# EAGLE board A111_Pulsed_Radar_Breakout-Panel (EAGLE 9.0.1), part 1 of 3
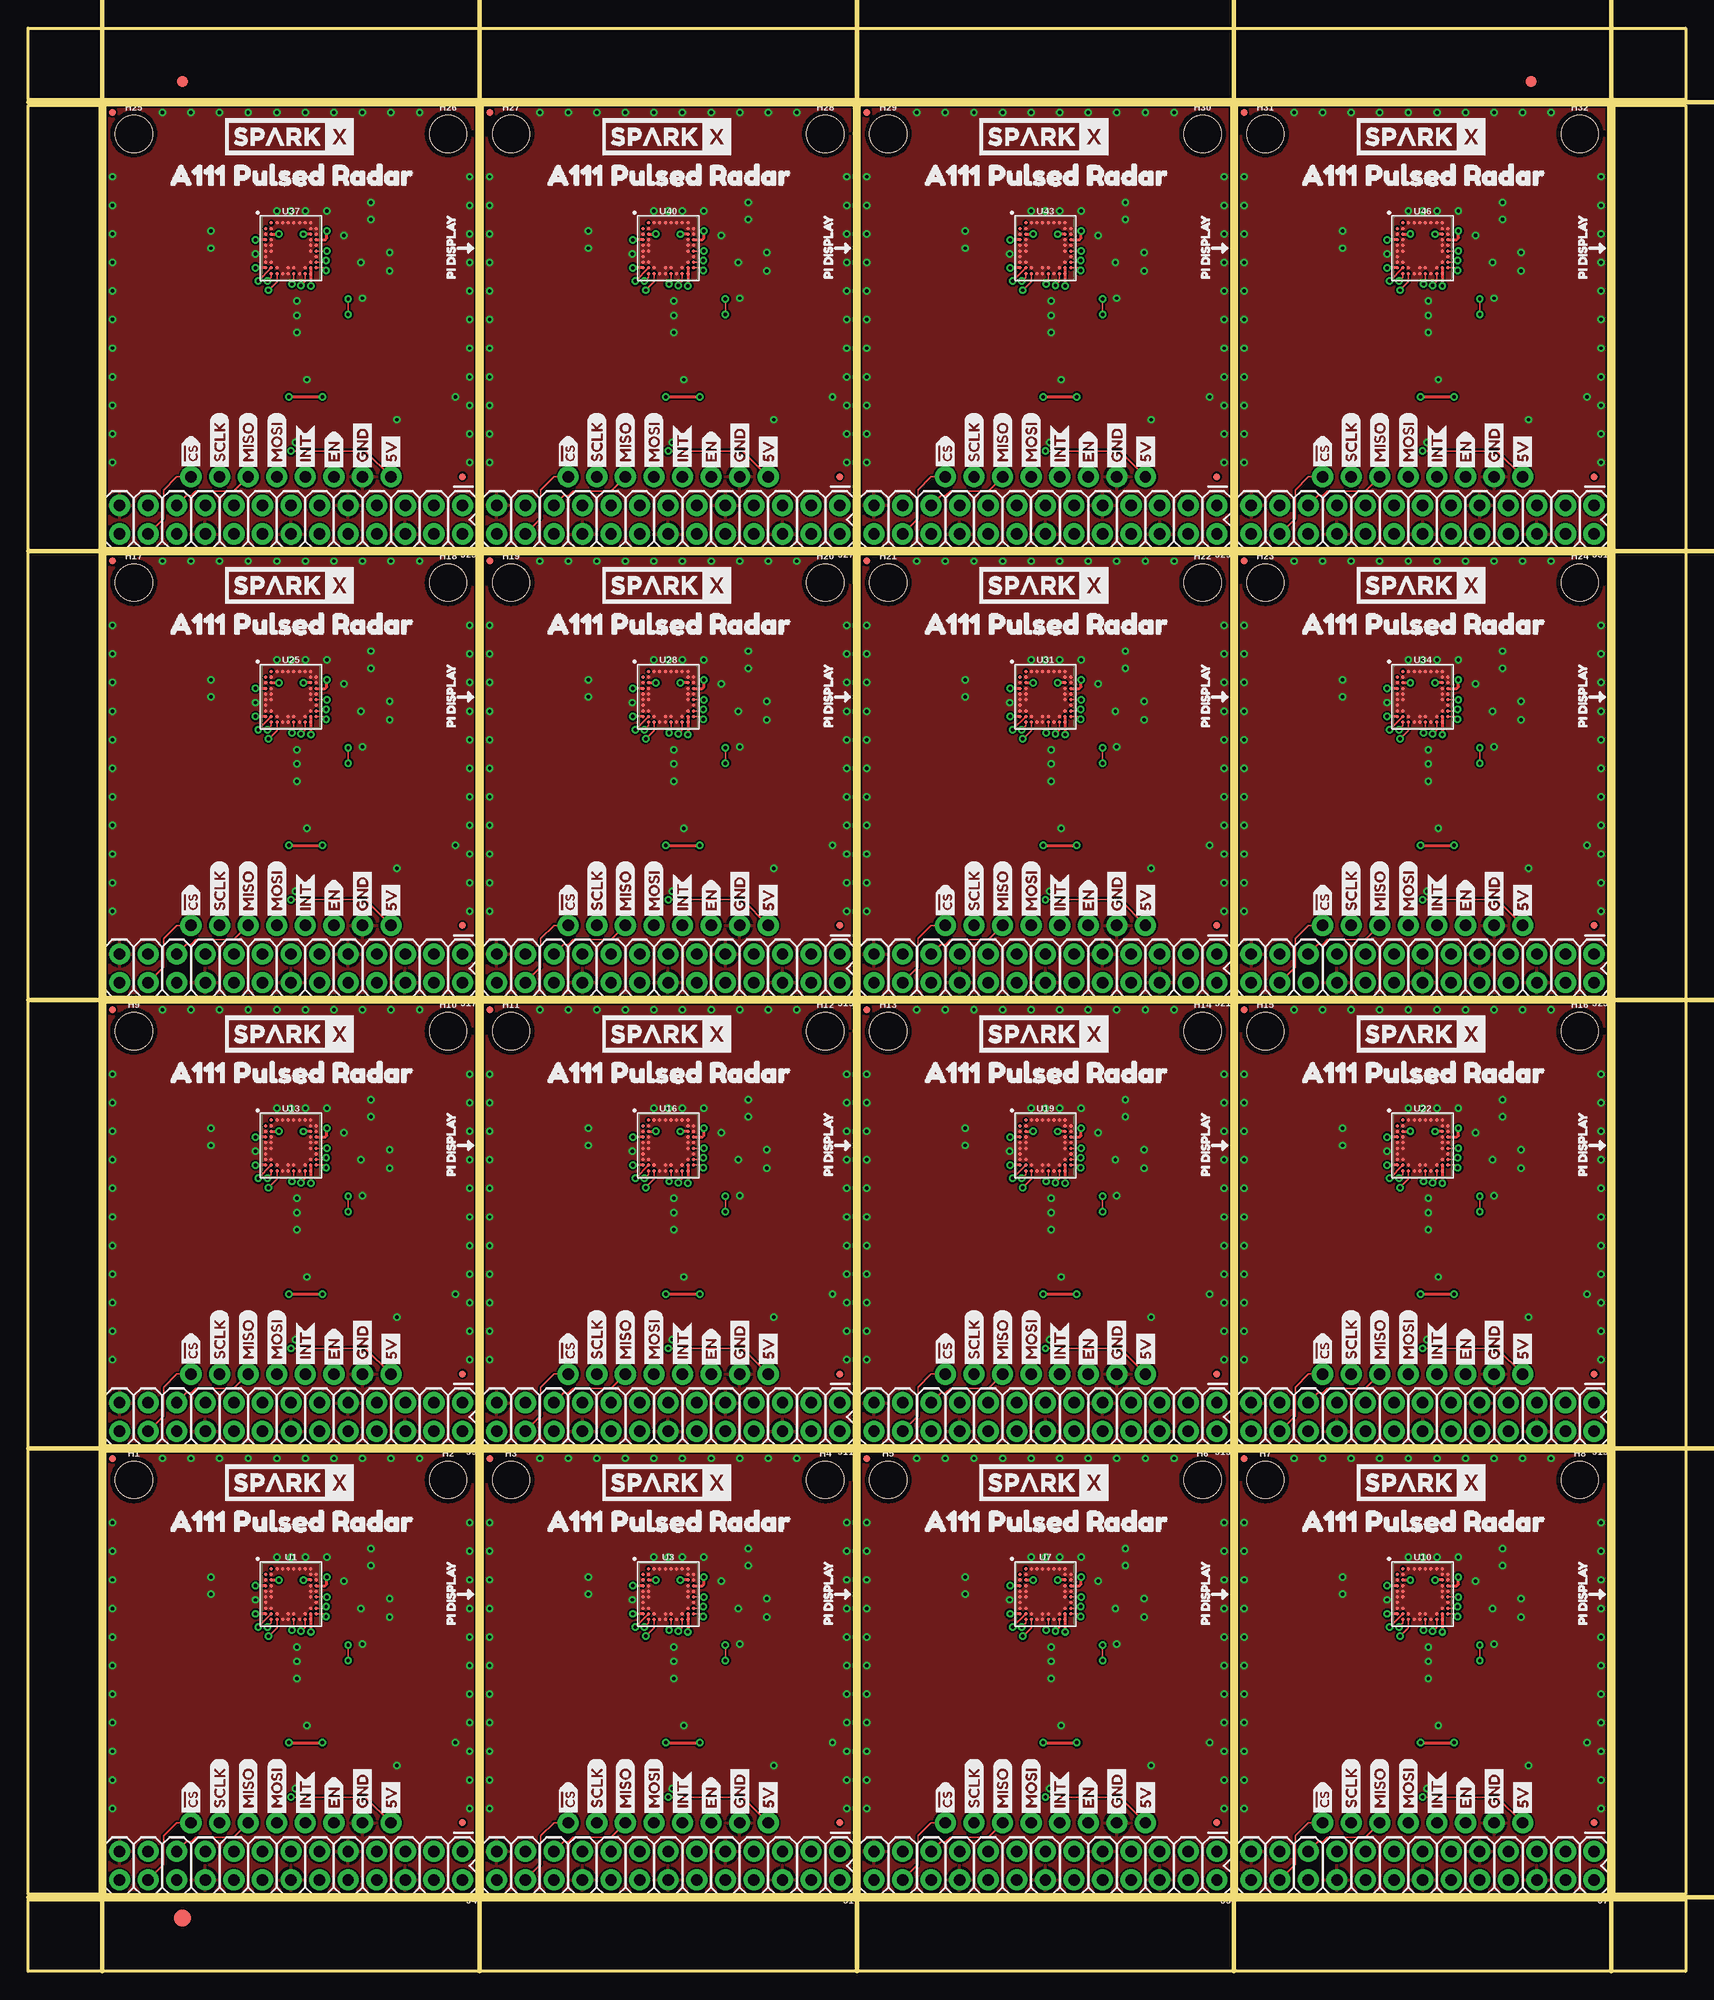
[diagram p0: board, top side]
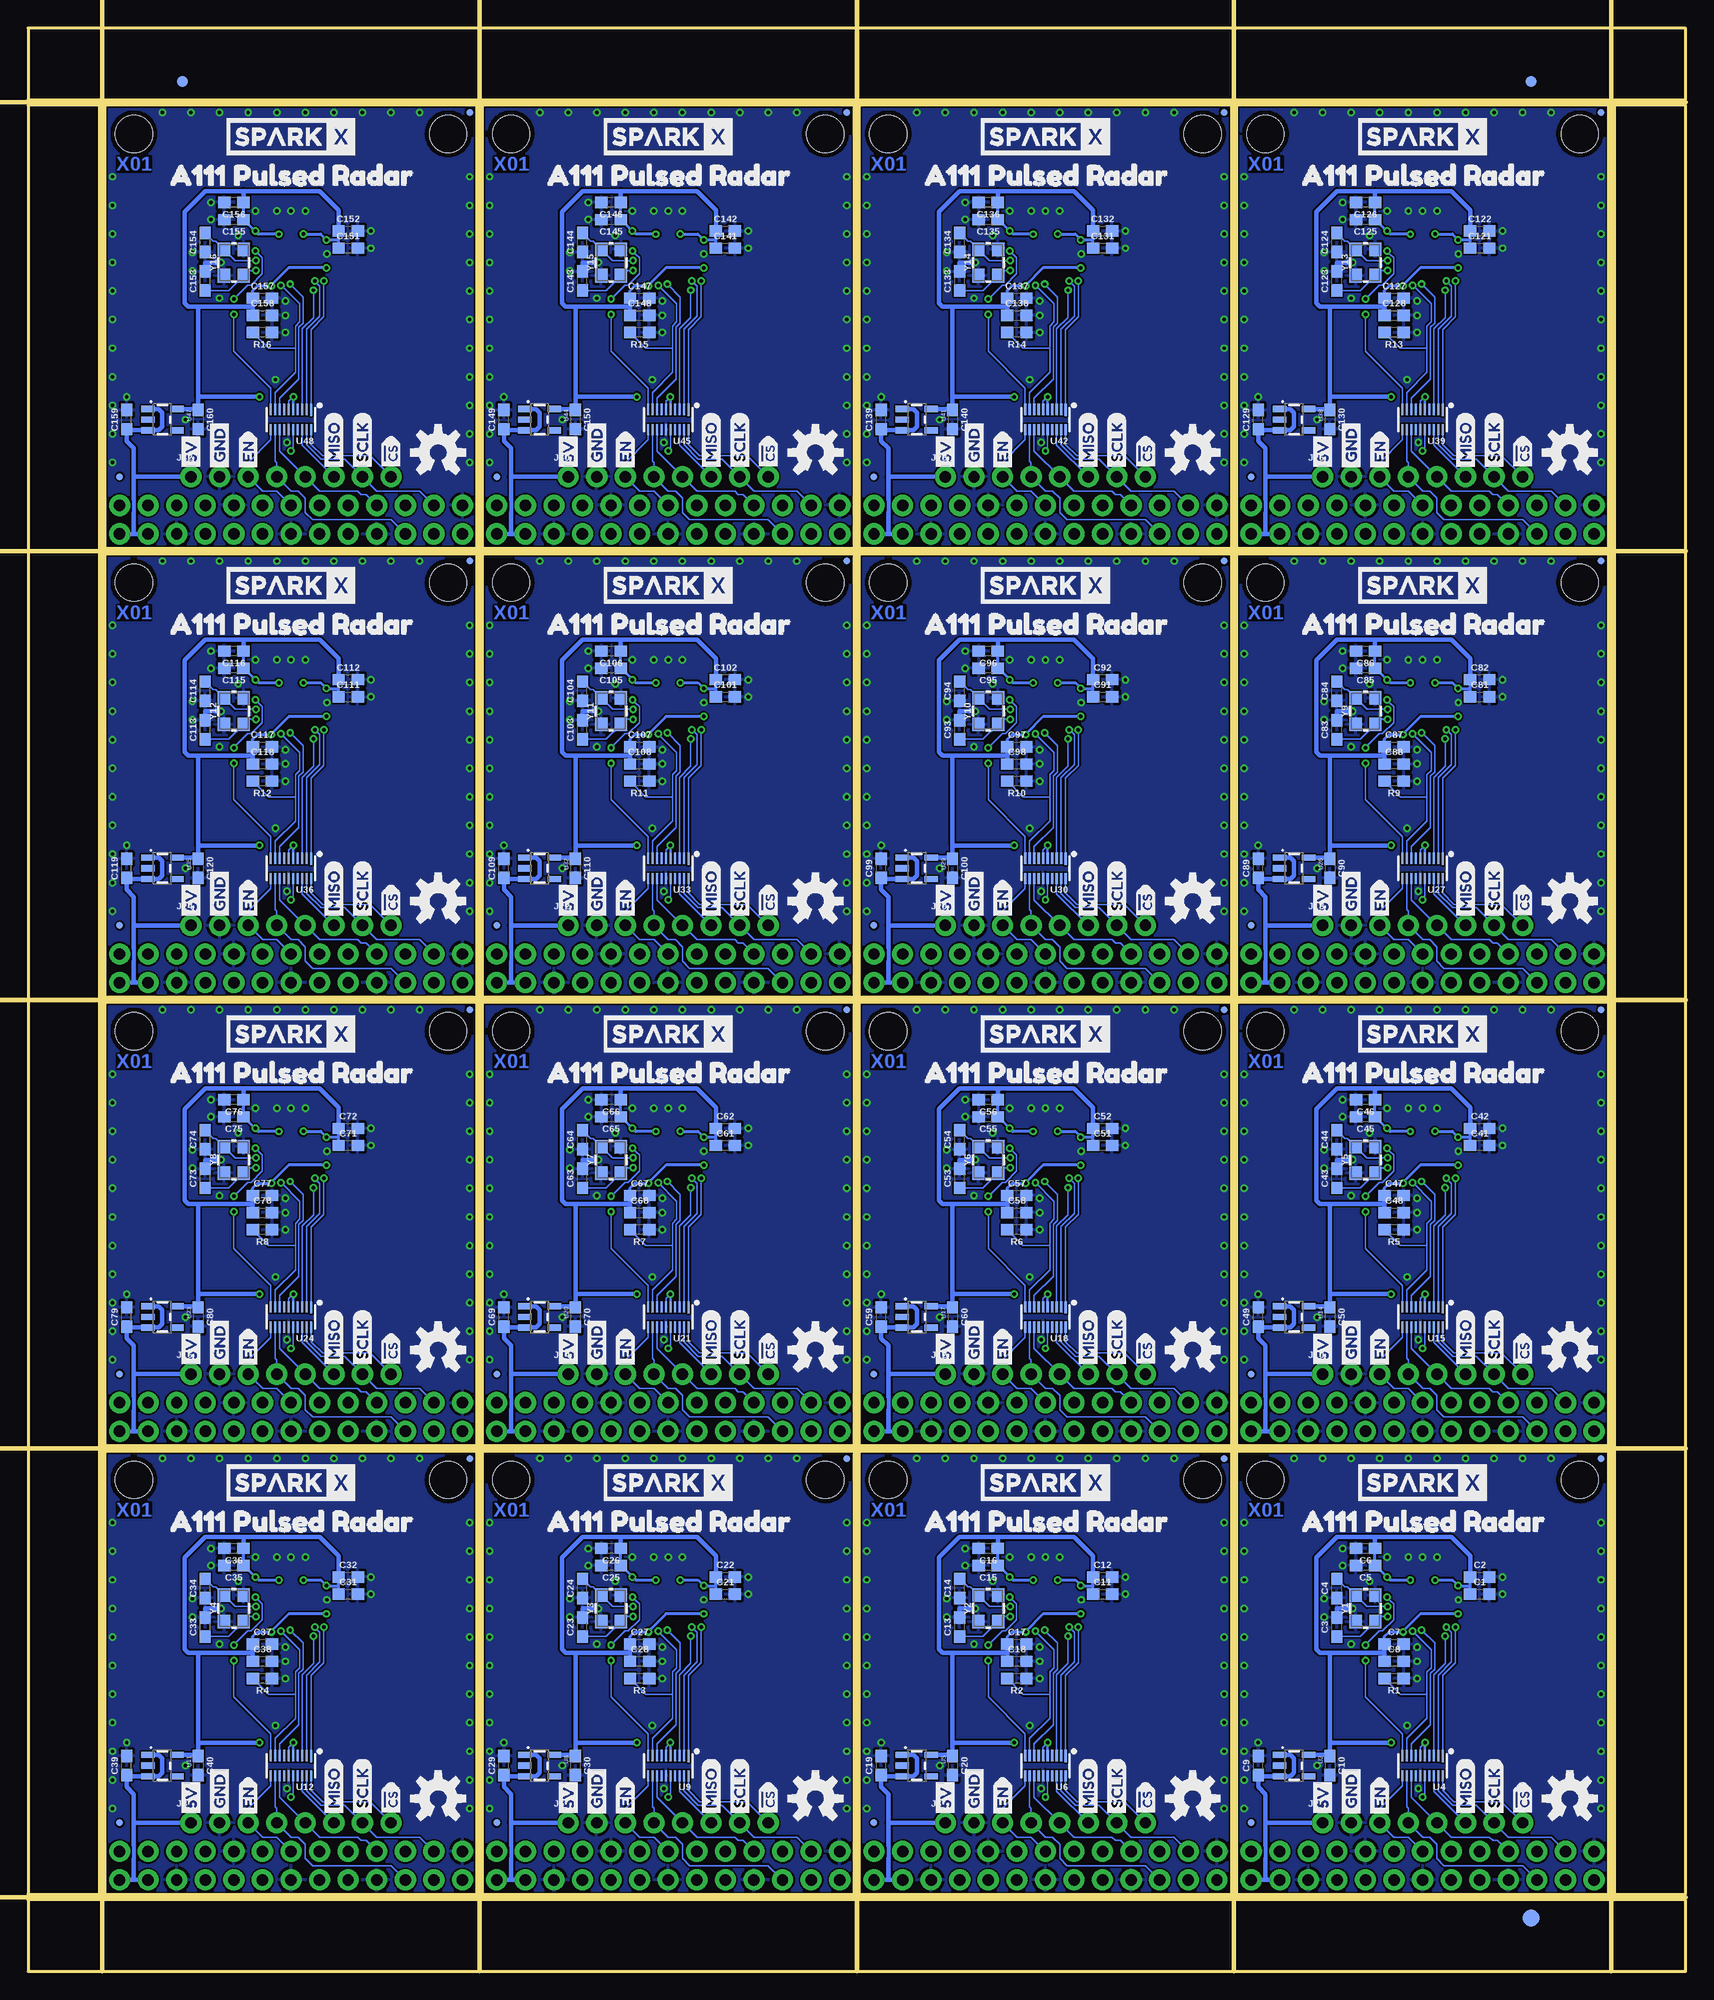
[diagram p1: board, bottom side, seen from below]

Size 147.32 x 172.72 mm. Coordinates in mm from the lower left corner, seen from the top.
Outline: 6.86,6.86 39.88,6.86 39.88,46.23 6.86,46.23 6.86,6.86
Outline: 40.39,6.86 73.41,6.86 73.41,46.23 40.39,46.23 40.39,6.86
Outline: 73.91,6.86 106.93,6.86 106.93,46.23 73.91,46.23 73.91,6.86
Outline: 107.44,6.86 140.46,6.86 140.46,46.23 107.44,46.23 107.44,6.86
Outline: 6.86,46.74 39.88,46.74 39.88,86.11 6.86,86.11 6.86,46.74
Outline: 40.39,46.74 73.41,46.74 73.41,86.11 40.39,86.11 40.39,46.74
Outline: 73.91,46.74 106.93,46.74 106.93,86.11 73.91,86.11 73.91,46.74
Outline: 107.44,46.74 140.46,46.74 140.46,86.11 107.44,86.11 107.44,46.74
Outline: 6.86,86.61 39.88,86.61 39.88,125.98 6.86,125.98 6.86,86.61
Outline: 40.39,86.61 73.41,86.61 73.41,125.98 40.39,125.98 40.39,86.61
Outline: 73.91,86.61 106.93,86.61 106.93,125.98 73.91,125.98 73.91,86.61
Outline: 107.44,86.61 140.46,86.61 140.46,125.98 107.44,125.98 107.44,86.61
Outline: 6.86,126.49 39.88,126.49 39.88,165.86 6.86,165.86 6.86,126.49
Outline: 40.39,126.49 73.41,126.49 73.41,165.86 40.39,165.86 40.39,126.49
Outline: 73.91,126.49 106.93,126.49 106.93,165.86 73.91,165.86 73.91,126.49
Outline: 107.44,126.49 140.46,126.49 140.46,165.86 107.44,165.86 107.44,126.49
Outline: 0,6.35 147.32,6.35 147.32,0 0,0 0,6.35
Outline: 140.97,165.86 147.32,165.86 147.32,6.86 140.97,6.86 140.97,165.86
Outline: 0,172.72 147.32,172.72 147.32,166.37 0,166.37 0,172.72
Outline: 0,165.86 6.35,165.86 6.35,6.86 0,6.86 0,165.86
Copper layers (1*16): Top 0.035mm / dielectric 1.5mm / Bottom 0.035mm
Design rules "SparkFun-2-layer-PCBWay-LIMIT": minimum track width 6mil, minimum drill 0.3mm, track to track 6mil, track to pad 6mil, pad to pad 6mil, via to via 6mil, smd to smd 6mil, copper to edge 6mil, drill to drill 6mil, minimum pad ring 7mil, minimum via ring 7mil, stop-mask expansion 4mil, vias tented up to drill 25mil, thermal gap 10mil
Milling: 10 lines

## Footprints (pad centres in the part's own frame; a part is rotated, then mirrored left to right if it is on the bottom)
0603 = smd 1.1 x 1: 1 -0.85,0; 2 0.85,0
FIDUCIAL-1X2 = smd 1 x 1: 1 0,0
FIDUCIAL-1.5X3 = smd 1.5 x 1.5: 1 0,0
FIDUCIAL-MICRO = smd 0.635 x 0.635: 1 0,0
STAND-OFF = hole 3.302: 0,0
2X13 = drill 1.016 pad 1.88: 1 0,0; 2 0,2.54; 3 2.54,0; 4 2.54,2.54; 5 5.08,0; 6 5.08,2.54; 7 7.62,0; 8 7.62,2.54; 9 10.16,0; 10 10.16,2.54; 11 12.7,0; 12 12.7,2.54; 13 15.24,0; 14 15.24,2.54; 15 17.78,0; 16 17.78,2.54; 17 20.32,0; 18 20.32,2.54; 19 22.86,0; 20 22.86,2.54; 21 25.4,0; 22 25.4,2.54; 23 27.94,0; 24 27.94,2.54; 25 30.48,0; 26 30.48,2.54
1X08_NO_SILK = drill 1.016 pad 1.88: 1 0,0; 2 2.54,0; 3 5.08,0; 4 7.62,0; 5 10.16,0; 6 12.7,0; 7 15.24,0; 8 17.78,0
A111 = smd 0.3 x 0.3: A2 -1.75,2.25; A3 -1.25,2.25; A4 -0.75,2.25; A5 -0.25,2.25; A6 0.25,2.25; A7 0.75,2.25; A8 1.25,2.25; A9 1.75,2.25; B1 -2.25,1.75; B2 -1.75,1.75; B9 1.75,1.75; B10 2.25,1.75; C1 -2.25,1.25; C2 -1.75,1.25; C9 1.75,1.25; C10 2.25,1.25; D1 -2.25,0.75; D2 -1.75,0.75; D9 1.75,0.75; D10 2.25,0.75; E1 -2.25,0.25; E2 -1.75,0.25; E9 1.75,0.25; E10 2.25,0.25; F1 -2.25,-0.25; F2 -1.75,-0.25; F9 1.75,-0.25; F10 2.25,-0.25; G1 -2.25,-0.75; G10 2.25,-0.75; H1 -2.25,-1.25; H2 -1.75,-1.25; H9 1.75,-1.25; H10 2.25,-1.25; J1 -2.25,-1.75; J2 -1.75,-1.75; J3 -1.25,-1.75; J5 -0.25,-1.75; J6 0.25,-1.75; J8 1.25,-1.75; J9 1.75,-1.75; J10 2.25,-1.75; K2 -1.75,-2.25; K3 -1.25,-2.25; K4 -0.75,-2.25; K5 -0.25,-2.25; K6 0.25,-2.25; K7 0.75,-2.25; K8 1.25,-2.25; K9 1.75,-2.25
SOT23-5 = smd 0.55 x 1.2: 1 -0.95,-1.3; 2 0,-1.3; 3 0.95,-1.3; 4 0.95,1.3; 5 -0.95,1.3
UFDFN-20 = smd 0.2 x 1.1: 1 -1.8,-0.85 | smd 0.2 x 1: 2 -1.4,-0.9; 3 -1,-0.9; 4 -0.6,-0.9; 5 -0.2,-0.9; 6 0.2,-0.9; 7 0.6,-0.9; 8 1,-0.9; 9 1.4,-0.9; 10 1.8,-0.9; 11 1.8,0.9; 12 1.4,0.9; 13 1,0.9; 14 0.6,0.9; 15 0.2,0.9; 16 -0.2,0.9; 17 -0.6,0.9; 18 -1,0.9; 19 -1.4,0.9; 20 -1.8,0.9
CRYSTAL-SMD-3.2X2.5MM = smd 1.2 x 1.1: 1 -1.175,-0.875; 2 1.175,-0.875; 3 1.175,0.875; 4 -1.175,0.875

## Placement (x,y rotation side)
C1  0.1uF  [0603]  18.29,33.53 0 bottom
C2  1.0uF  [0603]  18.29,35.05 0 bottom
C3  10pF  [0603]  30.99,30.61 90 bottom
C4  10pF  [0603]  30.99,34.04 90 bottom
C5  0.1uF  [0603]  28.45,36.07 180 bottom
C6  1.0uF  [0603]  28.45,37.59 180 bottom
C7  0.1uF  [0603]  25.91,29.08 0 bottom
C8  1.0uF  [0603]  25.91,27.56 0 bottom
C9  1.0uF  [0603]  37.97,18.29 90 bottom
C10  1.0uF  [0603]  31.62,18.29 270 bottom
C11  0.1uF  [0603]  51.82,33.53 0 bottom
C12  1.0uF  [0603]  51.82,35.05 0 bottom
C13  10pF  [0603]  64.52,30.61 90 bottom
C14  10pF  [0603]  64.52,34.04 90 bottom
C15  0.1uF  [0603]  61.98,36.07 180 bottom
C16  1.0uF  [0603]  61.98,37.59 180 bottom
C17  0.1uF  [0603]  59.44,29.08 0 bottom
C18  1.0uF  [0603]  59.44,27.56 0 bottom
C19  1.0uF  [0603]  71.5,18.29 90 bottom
C20  1.0uF  [0603]  65.15,18.29 270 bottom
C21  0.1uF  [0603]  85.34,33.53 0 bottom
C22  1.0uF  [0603]  85.34,35.05 0 bottom
C23  10pF  [0603]  98.04,30.61 90 bottom
C24  10pF  [0603]  98.04,34.04 90 bottom
C25  0.1uF  [0603]  95.5,36.07 180 bottom
C26  1.0uF  [0603]  95.5,37.59 180 bottom
C27  0.1uF  [0603]  92.96,29.08 0 bottom
C28  1.0uF  [0603]  92.96,27.56 0 bottom
C29  1.0uF  [0603]  105.03,18.29 90 bottom
C30  1.0uF  [0603]  98.68,18.29 270 bottom
C31  0.1uF  [0603]  118.87,33.53 0 bottom
C32  1.0uF  [0603]  118.87,35.05 0 bottom
C33  10pF  [0603]  131.57,30.61 90 bottom
C34  10pF  [0603]  131.57,34.04 90 bottom
C35  0.1uF  [0603]  129.03,36.07 180 bottom
C36  1.0uF  [0603]  129.03,37.59 180 bottom
C37  0.1uF  [0603]  126.49,29.08 0 bottom
C38  1.0uF  [0603]  126.49,27.56 0 bottom
C39  1.0uF  [0603]  138.56,18.29 90 bottom
C40  1.0uF  [0603]  132.21,18.29 270 bottom
C41  0.1uF  [0603]  18.29,73.41 0 bottom
C42  1.0uF  [0603]  18.29,74.93 0 bottom
C43  10pF  [0603]  30.99,70.48 90 bottom
C44  10pF  [0603]  30.99,73.91 90 bottom
C45  0.1uF  [0603]  28.45,75.95 180 bottom
C46  1.0uF  [0603]  28.45,77.47 180 bottom
C47  0.1uF  [0603]  25.91,68.96 0 bottom
C48  1.0uF  [0603]  25.91,67.44 0 bottom
C49  1.0uF  [0603]  37.97,58.17 90 bottom
C50  1.0uF  [0603]  31.62,58.17 270 bottom
C51  0.1uF  [0603]  51.82,73.41 0 bottom
C52  1.0uF  [0603]  51.82,74.93 0 bottom
C53  10pF  [0603]  64.52,70.48 90 bottom
C54  10pF  [0603]  64.52,73.91 90 bottom
C55  0.1uF  [0603]  61.98,75.95 180 bottom
C56  1.0uF  [0603]  61.98,77.47 180 bottom
C57  0.1uF  [0603]  59.44,68.96 0 bottom
C58  1.0uF  [0603]  59.44,67.44 0 bottom
C59  1.0uF  [0603]  71.5,58.17 90 bottom
C60  1.0uF  [0603]  65.15,58.17 270 bottom
C61  0.1uF  [0603]  85.34,73.41 0 bottom
C62  1.0uF  [0603]  85.34,74.93 0 bottom
C63  10pF  [0603]  98.04,70.48 90 bottom
C64  10pF  [0603]  98.04,73.91 90 bottom
C65  0.1uF  [0603]  95.5,75.95 180 bottom
C66  1.0uF  [0603]  95.5,77.47 180 bottom
C67  0.1uF  [0603]  92.96,68.96 0 bottom
C68  1.0uF  [0603]  92.96,67.44 0 bottom
C69  1.0uF  [0603]  105.03,58.17 90 bottom
C70  1.0uF  [0603]  98.68,58.17 270 bottom
C71  0.1uF  [0603]  118.87,73.41 0 bottom
C72  1.0uF  [0603]  118.87,74.93 0 bottom
C73  10pF  [0603]  131.57,70.48 90 bottom
C74  10pF  [0603]  131.57,73.91 90 bottom
C75  0.1uF  [0603]  129.03,75.95 180 bottom
C76  1.0uF  [0603]  129.03,77.47 180 bottom
C77  0.1uF  [0603]  126.49,68.96 0 bottom
C78  1.0uF  [0603]  126.49,67.44 0 bottom
C79  1.0uF  [0603]  138.56,58.17 90 bottom
C80  1.0uF  [0603]  132.21,58.17 270 bottom
C81  0.1uF  [0603]  18.29,113.28 0 bottom
C82  1.0uF  [0603]  18.29,114.81 0 bottom
C83  10pF  [0603]  30.99,110.36 90 bottom
C84  10pF  [0603]  30.99,113.79 90 bottom
C85  0.1uF  [0603]  28.45,115.82 180 bottom
C86  1.0uF  [0603]  28.45,117.35 180 bottom
C87  0.1uF  [0603]  25.91,108.84 0 bottom
C88  1.0uF  [0603]  25.91,107.31 0 bottom
C89  1.0uF  [0603]  37.97,98.04 90 bottom
C90  1.0uF  [0603]  31.62,98.04 270 bottom
C91  0.1uF  [0603]  51.82,113.28 0 bottom
C92  1.0uF  [0603]  51.82,114.81 0 bottom
C93  10pF  [0603]  64.52,110.36 90 bottom
C94  10pF  [0603]  64.52,113.79 90 bottom
C95  0.1uF  [0603]  61.98,115.82 180 bottom
C96  1.0uF  [0603]  61.98,117.35 180 bottom
C97  0.1uF  [0603]  59.44,108.84 0 bottom
C98  1.0uF  [0603]  59.44,107.31 0 bottom
C99  1.0uF  [0603]  71.5,98.04 90 bottom
C100  1.0uF  [0603]  65.15,98.04 270 bottom
C101  0.1uF  [0603]  85.34,113.28 0 bottom
C102  1.0uF  [0603]  85.34,114.81 0 bottom
C103  10pF  [0603]  98.04,110.36 90 bottom
C104  10pF  [0603]  98.04,113.79 90 bottom
C105  0.1uF  [0603]  95.5,115.82 180 bottom
C106  1.0uF  [0603]  95.5,117.35 180 bottom
C107  0.1uF  [0603]  92.96,108.84 0 bottom
C108  1.0uF  [0603]  92.96,107.31 0 bottom
C109  1.0uF  [0603]  105.03,98.04 90 bottom
C110  1.0uF  [0603]  98.68,98.04 270 bottom
C111  0.1uF  [0603]  118.87,113.28 0 bottom
C112  1.0uF  [0603]  118.87,114.81 0 bottom
C113  10pF  [0603]  131.57,110.36 90 bottom
C114  10pF  [0603]  131.57,113.79 90 bottom
C115  0.1uF  [0603]  129.03,115.82 180 bottom
C116  1.0uF  [0603]  129.03,117.35 180 bottom
C117  0.1uF  [0603]  126.49,108.84 0 bottom
C118  1.0uF  [0603]  126.49,107.31 0 bottom
C119  1.0uF  [0603]  138.56,98.04 90 bottom
C120  1.0uF  [0603]  132.21,98.04 270 bottom
C121  0.1uF  [0603]  18.29,153.16 0 bottom
C122  1.0uF  [0603]  18.29,154.69 0 bottom
C123  10pF  [0603]  30.99,150.24 90 bottom
C124  10pF  [0603]  30.99,153.67 90 bottom
C125  0.1uF  [0603]  28.45,155.7 180 bottom
C126  1.0uF  [0603]  28.45,157.23 180 bottom
C127  0.1uF  [0603]  25.91,148.72 0 bottom
C128  1.0uF  [0603]  25.91,147.19 0 bottom
C129  1.0uF  [0603]  37.97,137.92 90 bottom
C130  1.0uF  [0603]  31.62,137.92 270 bottom
C131  0.1uF  [0603]  51.82,153.16 0 bottom
C132  1.0uF  [0603]  51.82,154.69 0 bottom
C133  10pF  [0603]  64.52,150.24 90 bottom
C134  10pF  [0603]  64.52,153.67 90 bottom
C135  0.1uF  [0603]  61.98,155.7 180 bottom
C136  1.0uF  [0603]  61.98,157.23 180 bottom
C137  0.1uF  [0603]  59.44,148.72 0 bottom
C138  1.0uF  [0603]  59.44,147.19 0 bottom
C139  1.0uF  [0603]  71.5,137.92 90 bottom
C140  1.0uF  [0603]  65.15,137.92 270 bottom
C141  0.1uF  [0603]  85.34,153.16 0 bottom
C142  1.0uF  [0603]  85.34,154.69 0 bottom
C143  10pF  [0603]  98.04,150.24 90 bottom
C144  10pF  [0603]  98.04,153.67 90 bottom
C145  0.1uF  [0603]  95.5,155.7 180 bottom
C146  1.0uF  [0603]  95.5,157.23 180 bottom
C147  0.1uF  [0603]  92.96,148.72 0 bottom
C148  1.0uF  [0603]  92.96,147.19 0 bottom
C149  1.0uF  [0603]  105.03,137.92 90 bottom
C150  1.0uF  [0603]  98.68,137.92 270 bottom
C151  0.1uF  [0603]  118.87,153.16 0 bottom
C152  1.0uF  [0603]  118.87,154.69 0 bottom
C153  10pF  [0603]  131.57,150.24 90 bottom
C154  10pF  [0603]  131.57,153.67 90 bottom
C155  0.1uF  [0603]  129.03,155.7 180 bottom
C156  1.0uF  [0603]  129.03,157.23 180 bottom
C157  0.1uF  [0603]  126.49,148.72 0 bottom
C158  1.0uF  [0603]  126.49,147.19 0 bottom
C159  1.0uF  [0603]  138.56,137.92 90 bottom
C160  1.0uF  [0603]  132.21,137.92 270 bottom
E$1  [FIDUCIAL-1X2]  13.72,167.96 0 top
E$2  [FIDUCIAL-1X2]  13.72,167.96 0 bottom
E$3  [FIDUCIAL-1X2]  133.6,167.96 0 top
E$4  [FIDUCIAL-1X2]  133.6,167.96 0 bottom
E$5  [FIDUCIAL-1.5X3]  13.72,4.76 0 top
E$6  [FIDUCIAL-1.5X3]  13.72,4.76 0 bottom
FD1  FIDUCIALUFIDUCIAL  [FIDUCIAL-MICRO]  38.61,13.21 0 top
FD2  FIDUCIALUFIDUCIAL  [FIDUCIAL-MICRO]  7.49,45.59 0 top
FD3  FIDUCIALUFIDUCIAL  [FIDUCIAL-MICRO]  7.49,45.59 0 bottom
FD4  FIDUCIALUFIDUCIAL  [FIDUCIAL-MICRO]  38.61,13.21 0 bottom
FD5  FIDUCIALUFIDUCIAL  [FIDUCIAL-MICRO]  72.14,13.21 0 top
FD6  FIDUCIALUFIDUCIAL  [FIDUCIAL-MICRO]  41.02,45.59 0 top
FD7  FIDUCIALUFIDUCIAL  [FIDUCIAL-MICRO]  41.02,45.59 0 bottom
FD8  FIDUCIALUFIDUCIAL  [FIDUCIAL-MICRO]  72.14,13.21 0 bottom
FD9  FIDUCIALUFIDUCIAL  [FIDUCIAL-MICRO]  105.66,13.21 0 top
FD10  FIDUCIALUFIDUCIAL  [FIDUCIAL-MICRO]  74.55,45.59 0 top
FD11  FIDUCIALUFIDUCIAL  [FIDUCIAL-MICRO]  74.55,45.59 0 bottom
FD12  FIDUCIALUFIDUCIAL  [FIDUCIAL-MICRO]  105.66,13.21 0 bottom
FD13  FIDUCIALUFIDUCIAL  [FIDUCIAL-MICRO]  139.19,13.21 0 top
FD14  FIDUCIALUFIDUCIAL  [FIDUCIAL-MICRO]  108.08,45.59 0 top
FD15  FIDUCIALUFIDUCIAL  [FIDUCIAL-MICRO]  108.08,45.59 0 bottom
FD16  FIDUCIALUFIDUCIAL  [FIDUCIAL-MICRO]  139.19,13.21 0 bottom
FD17  FIDUCIALUFIDUCIAL  [FIDUCIAL-MICRO]  38.61,53.09 0 top
FD18  FIDUCIALUFIDUCIAL  [FIDUCIAL-MICRO]  7.49,85.47 0 top
FD19  FIDUCIALUFIDUCIAL  [FIDUCIAL-MICRO]  7.49,85.47 0 bottom
FD20  FIDUCIALUFIDUCIAL  [FIDUCIAL-MICRO]  38.61,53.09 0 bottom
FD21  FIDUCIALUFIDUCIAL  [FIDUCIAL-MICRO]  72.14,53.09 0 top
FD22  FIDUCIALUFIDUCIAL  [FIDUCIAL-MICRO]  41.02,85.47 0 top
FD23  FIDUCIALUFIDUCIAL  [FIDUCIAL-MICRO]  41.02,85.47 0 bottom
FD24  FIDUCIALUFIDUCIAL  [FIDUCIAL-MICRO]  72.14,53.09 0 bottom
FD25  FIDUCIALUFIDUCIAL  [FIDUCIAL-MICRO]  105.66,53.09 0 top
FD26  FIDUCIALUFIDUCIAL  [FIDUCIAL-MICRO]  74.55,85.47 0 top
FD27  FIDUCIALUFIDUCIAL  [FIDUCIAL-MICRO]  74.55,85.47 0 bottom
FD28  FIDUCIALUFIDUCIAL  [FIDUCIAL-MICRO]  105.66,53.09 0 bottom
FD29  FIDUCIALUFIDUCIAL  [FIDUCIAL-MICRO]  139.19,53.09 0 top
FD30  FIDUCIALUFIDUCIAL  [FIDUCIAL-MICRO]  108.08,85.47 0 top
FD31  FIDUCIALUFIDUCIAL  [FIDUCIAL-MICRO]  108.08,85.47 0 bottom
FD32  FIDUCIALUFIDUCIAL  [FIDUCIAL-MICRO]  139.19,53.09 0 bottom
FD33  FIDUCIALUFIDUCIAL  [FIDUCIAL-MICRO]  38.61,92.96 0 top
FD34  FIDUCIALUFIDUCIAL  [FIDUCIAL-MICRO]  7.49,125.35 0 top
FD35  FIDUCIALUFIDUCIAL  [FIDUCIAL-MICRO]  7.49,125.35 0 bottom
FD36  FIDUCIALUFIDUCIAL  [FIDUCIAL-MICRO]  38.61,92.96 0 bottom
FD37  FIDUCIALUFIDUCIAL  [FIDUCIAL-MICRO]  72.14,92.96 0 top
FD38  FIDUCIALUFIDUCIAL  [FIDUCIAL-MICRO]  41.02,125.35 0 top
FD39  FIDUCIALUFIDUCIAL  [FIDUCIAL-MICRO]  41.02,125.35 0 bottom
FD40  FIDUCIALUFIDUCIAL  [FIDUCIAL-MICRO]  72.14,92.96 0 bottom
FD41  FIDUCIALUFIDUCIAL  [FIDUCIAL-MICRO]  105.66,92.96 0 top
FD42  FIDUCIALUFIDUCIAL  [FIDUCIAL-MICRO]  74.55,125.35 0 top
FD43  FIDUCIALUFIDUCIAL  [FIDUCIAL-MICRO]  74.55,125.35 0 bottom
FD44  FIDUCIALUFIDUCIAL  [FIDUCIAL-MICRO]  105.66,92.96 0 bottom
FD45  FIDUCIALUFIDUCIAL  [FIDUCIAL-MICRO]  139.19,92.96 0 top
FD46  FIDUCIALUFIDUCIAL  [FIDUCIAL-MICRO]  108.08,125.35 0 top
FD47  FIDUCIALUFIDUCIAL  [FIDUCIAL-MICRO]  108.08,125.35 0 bottom
FD48  FIDUCIALUFIDUCIAL  [FIDUCIAL-MICRO]  139.19,92.96 0 bottom
FD49  FIDUCIALUFIDUCIAL  [FIDUCIAL-MICRO]  38.61,132.84 0 top
FD50  FIDUCIALUFIDUCIAL  [FIDUCIAL-MICRO]  7.49,165.23 0 top
FD51  FIDUCIALUFIDUCIAL  [FIDUCIAL-MICRO]  7.49,165.23 0 bottom
FD52  FIDUCIALUFIDUCIAL  [FIDUCIAL-MICRO]  38.61,132.84 0 bottom
FD53  FIDUCIALUFIDUCIAL  [FIDUCIAL-MICRO]  72.14,132.84 0 top
FD54  FIDUCIALUFIDUCIAL  [FIDUCIAL-MICRO]  41.02,165.23 0 top
FD55  FIDUCIALUFIDUCIAL  [FIDUCIAL-MICRO]  41.02,165.23 0 bottom
FD56  FIDUCIALUFIDUCIAL  [FIDUCIAL-MICRO]  72.14,132.84 0 bottom
FD57  FIDUCIALUFIDUCIAL  [FIDUCIAL-MICRO]  105.66,132.84 0 top
FD58  FIDUCIALUFIDUCIAL  [FIDUCIAL-MICRO]  74.55,165.23 0 top
FD59  FIDUCIALUFIDUCIAL  [FIDUCIAL-MICRO]  74.55,165.23 0 bottom
FD60  FIDUCIALUFIDUCIAL  [FIDUCIAL-MICRO]  105.66,132.84 0 bottom
FD61  FIDUCIALUFIDUCIAL  [FIDUCIAL-MICRO]  139.19,132.84 0 top
FD62  FIDUCIALUFIDUCIAL  [FIDUCIAL-MICRO]  108.08,165.23 0 top
FD63  FIDUCIALUFIDUCIAL  [FIDUCIAL-MICRO]  108.08,165.23 0 bottom
FD64  FIDUCIALUFIDUCIAL  [FIDUCIAL-MICRO]  139.19,132.84 0 bottom
H1  STAND-OFF  [STAND-OFF]  9.4,43.69 0 top
H2  STAND-OFF  [STAND-OFF]  37.34,43.69 0 top
H3  STAND-OFF  [STAND-OFF]  42.93,43.69 0 top
H4  STAND-OFF  [STAND-OFF]  70.87,43.69 0 top
H5  STAND-OFF  [STAND-OFF]  76.45,43.69 0 top
H6  STAND-OFF  [STAND-OFF]  104.39,43.69 0 top
H7  STAND-OFF  [STAND-OFF]  109.98,43.69 0 top
H8  STAND-OFF  [STAND-OFF]  137.92,43.69 0 top
H9  STAND-OFF  [STAND-OFF]  9.4,83.57 0 top
H10  STAND-OFF  [STAND-OFF]  37.34,83.57 0 top
H11  STAND-OFF  [STAND-OFF]  42.93,83.57 0 top
H12  STAND-OFF  [STAND-OFF]  70.87,83.57 0 top
H13  STAND-OFF  [STAND-OFF]  76.45,83.57 0 top
H14  STAND-OFF  [STAND-OFF]  104.39,83.57 0 top
H15  STAND-OFF  [STAND-OFF]  109.98,83.57 0 top
H16  STAND-OFF  [STAND-OFF]  137.92,83.57 0 top
H17  STAND-OFF  [STAND-OFF]  9.4,123.44 0 top
H18  STAND-OFF  [STAND-OFF]  37.34,123.44 0 top
H19  STAND-OFF  [STAND-OFF]  42.93,123.44 0 top
H20  STAND-OFF  [STAND-OFF]  70.87,123.44 0 top
H21  STAND-OFF  [STAND-OFF]  76.45,123.44 0 top
H22  STAND-OFF  [STAND-OFF]  104.39,123.44 0 top
H23  STAND-OFF  [STAND-OFF]  109.98,123.44 0 top
H24  STAND-OFF  [STAND-OFF]  137.92,123.44 0 top
H25  STAND-OFF  [STAND-OFF]  9.4,163.32 0 top
H26  STAND-OFF  [STAND-OFF]  37.34,163.32 0 top
H27  STAND-OFF  [STAND-OFF]  42.93,163.32 0 top
H28  STAND-OFF  [STAND-OFF]  70.87,163.32 0 top
H29  STAND-OFF  [STAND-OFF]  76.45,163.32 0 top
H30  STAND-OFF  [STAND-OFF]  104.39,163.32 0 top
H31  STAND-OFF  [STAND-OFF]  109.98,163.32 0 top
H32  STAND-OFF  [STAND-OFF]  137.92,163.32 0 top
J1  RASPBERRYPI-26-PIN-GPIO  [2X13]  72.14,10.67 180 top
J2  [1X08_NO_SILK]  32.26,13.21 0 bottom
J3  [1X08_NO_SILK]  65.79,13.21 0 bottom
J4  RASPBERRYPI-26-PIN-GPIO  [2X13]  38.61,10.67 180 top
J5  RASPBERRYPI-26-PIN-GPIO  [2X13]  105.66,10.67 180 top
J6  [1X08_NO_SILK]  99.31,13.21 0 bottom
J7  RASPBERRYPI-26-PIN-GPIO  [2X13]  139.19,10.67 180 top
J8  [1X08_NO_SILK]  132.84,13.21 0 bottom
J9  RASPBERRYPI-26-PIN-GPIO  [2X13]  38.61,50.55 180 top
J10  [1X08_NO_SILK]  32.26,53.09 0 bottom
J11  RASPBERRYPI-26-PIN-GPIO  [2X13]  72.14,50.55 180 top
J12  [1X08_NO_SILK]  65.79,53.09 0 bottom
J13  RASPBERRYPI-26-PIN-GPIO  [2X13]  105.66,50.55 180 top
J14  [1X08_NO_SILK]  99.31,53.09 0 bottom
J15  RASPBERRYPI-26-PIN-GPIO  [2X13]  139.19,50.55 180 top
J16  [1X08_NO_SILK]  132.84,53.09 0 bottom
J17  RASPBERRYPI-26-PIN-GPIO  [2X13]  38.61,90.42 180 top
J18  [1X08_NO_SILK]  32.26,92.96 0 bottom
J19  RASPBERRYPI-26-PIN-GPIO  [2X13]  72.14,90.42 180 top
J20  [1X08_NO_SILK]  65.79,92.96 0 bottom
J21  RASPBERRYPI-26-PIN-GPIO  [2X13]  105.66,90.42 180 top
J22  [1X08_NO_SILK]  99.31,92.96 0 bottom
J23  RASPBERRYPI-26-PIN-GPIO  [2X13]  139.19,90.42 180 top
J24  [1X08_NO_SILK]  132.84,92.96 0 bottom
J25  RASPBERRYPI-26-PIN-GPIO  [2X13]  38.61,130.3 180 top
J26  [1X08_NO_SILK]  32.26,132.84 0 bottom
J27  RASPBERRYPI-26-PIN-GPIO  [2X13]  72.14,130.3 180 top
J28  [1X08_NO_SILK]  65.79,132.84 0 bottom
J29  RASPBERRYPI-26-PIN-GPIO  [2X13]  105.66,130.3 180 top
J30  [1X08_NO_SILK]  99.31,132.84 0 bottom
J31  RASPBERRYPI-26-PIN-GPIO  [2X13]  139.19,130.3 180 top
J32  [1X08_NO_SILK]  132.84,132.84 0 bottom
LOGO1  SPARKX-LOGO5  [SPARKX-LARGE]  23.24,43.43 0 top
LOGO2  OSHW-LOGOM  [OSHW-LOGO-M]  10.29,15.37 0 bottom
LOGO3  SPARKX-LOGO5  [SPARKX-LARGE]  23.37,43.43 0 bottom
LOGO4  SPARKX-LOGO5  [SPARKX-LARGE]  56.77,43.43 0 top
LOGO5  OSHW-LOGOM  [OSHW-LOGO-M]  43.81,15.37 0 bottom
LOGO6  SPARKX-LOGO5  [SPARKX-LARGE]  56.9,43.43 0 bottom
LOGO7  SPARKX-LOGO5  [SPARKX-LARGE]  90.3,43.43 0 top
LOGO8  OSHW-LOGOM  [OSHW-LOGO-M]  77.34,15.37 0 bottom
LOGO9  SPARKX-LOGO5  [SPARKX-LARGE]  90.42,43.43 0 bottom
LOGO10  SPARKX-LOGO5  [SPARKX-LARGE]  123.83,43.43 0 top
LOGO11  OSHW-LOGOM  [OSHW-LOGO-M]  110.87,15.37 0 bottom
LOGO12  SPARKX-LOGO5  [SPARKX-LARGE]  123.95,43.43 0 bottom
LOGO13  SPARKX-LOGO5  [SPARKX-LARGE]  23.24,83.31 0 top
LOGO14  OSHW-LOGOM  [OSHW-LOGO-M]  10.29,55.24 0 bottom
LOGO15  SPARKX-LOGO5  [SPARKX-LARGE]  23.37,83.31 0 bottom
LOGO16  SPARKX-LOGO5  [SPARKX-LARGE]  56.77,83.31 0 top
LOGO17  OSHW-LOGOM  [OSHW-LOGO-M]  43.81,55.24 0 bottom
LOGO18  SPARKX-LOGO5  [SPARKX-LARGE]  56.9,83.31 0 bottom
LOGO19  SPARKX-LOGO5  [SPARKX-LARGE]  90.3,83.31 0 top
LOGO20  OSHW-LOGOM  [OSHW-LOGO-M]  77.34,55.24 0 bottom
LOGO21  SPARKX-LOGO5  [SPARKX-LARGE]  90.42,83.31 0 bottom
LOGO22  SPARKX-LOGO5  [SPARKX-LARGE]  123.83,83.31 0 top
LOGO23  OSHW-LOGOM  [OSHW-LOGO-M]  110.87,55.24 0 bottom
LOGO24  SPARKX-LOGO5  [SPARKX-LARGE]  123.95,83.31 0 bottom
LOGO25  SPARKX-LOGO5  [SPARKX-LARGE]  23.24,123.19 0 top
LOGO26  OSHW-LOGOM  [OSHW-LOGO-M]  10.29,95.12 0 bottom
LOGO27  SPARKX-LOGO5  [SPARKX-LARGE]  23.37,123.19 0 bottom
LOGO28  SPARKX-LOGO5  [SPARKX-LARGE]  56.77,123.19 0 top
LOGO29  OSHW-LOGOM  [OSHW-LOGO-M]  43.81,95.12 0 bottom
LOGO30  SPARKX-LOGO5  [SPARKX-LARGE]  56.9,123.19 0 bottom
LOGO31  SPARKX-LOGO5  [SPARKX-LARGE]  90.3,123.19 0 top
LOGO32  OSHW-LOGOM  [OSHW-LOGO-M]  77.34,95.12 0 bottom
LOGO33  SPARKX-LOGO5  [SPARKX-LARGE]  90.42,123.19 0 bottom
LOGO34  SPARKX-LOGO5  [SPARKX-LARGE]  123.83,123.19 0 top
LOGO35  OSHW-LOGOM  [OSHW-LOGO-M]  110.87,95.12 0 bottom
LOGO36  SPARKX-LOGO5  [SPARKX-LARGE]  123.95,123.19 0 bottom
LOGO37  SPARKX-LOGO5  [SPARKX-LARGE]  23.24,163.07 0 top
LOGO38  OSHW-LOGOM  [OSHW-LOGO-M]  10.29,135 0 bottom
LOGO39  SPARKX-LOGO5  [SPARKX-LARGE]  23.37,163.07 0 bottom
LOGO40  SPARKX-LOGO5  [SPARKX-LARGE]  56.77,163.07 0 top
LOGO41  OSHW-LOGOM  [OSHW-LOGO-M]  43.81,135 0 bottom
LOGO42  SPARKX-LOGO5  [SPARKX-LARGE]  56.9,163.07 0 bottom
LOGO43  SPARKX-LOGO5  [SPARKX-LARGE]  90.3,163.07 0 top
LOGO44  OSHW-LOGOM  [OSHW-LOGO-M]  77.34,135 0 bottom
LOGO45  SPARKX-LOGO5  [SPARKX-LARGE]  90.42,163.07 0 bottom
LOGO46  SPARKX-LOGO5  [SPARKX-LARGE]  123.83,163.07 0 top
LOGO47  OSHW-LOGOM  [OSHW-LOGO-M]  110.87,135 0 bottom
LOGO48  SPARKX-LOGO5  [SPARKX-LARGE]  123.95,163.07 0 bottom
R1  100k  [0603]  25.91,26.04 180 bottom
R2  100k  [0603]  59.44,26.04 180 bottom
R3  100k  [0603]  92.96,26.04 180 bottom
R4  100k  [0603]  126.49,26.04 180 bottom
R5  100k  [0603]  25.91,65.91 180 bottom
R6  100k  [0603]  59.44,65.91 180 bottom
R7  100k  [0603]  92.96,65.91 180 bottom
R8  100k  [0603]  126.49,65.91 180 bottom
R9  100k  [0603]  25.91,105.79 180 bottom
R10  100k  [0603]  59.44,105.79 180 bottom
R11  100k  [0603]  92.96,105.79 180 bottom
R12  100k  [0603]  126.49,105.79 180 bottom
R13  100k  [0603]  25.91,145.67 180 bottom
R14  100k  [0603]  59.44,145.67 180 bottom
R15  100k  [0603]  92.96,145.67 180 bottom
R16  100k  [0603]  126.49,145.67 180 bottom
U1  A111  [A111]  23.37,33.53 0 top
U2  V_REG_AP2112K-1.8  [SOT23-5]  34.8,18.29 270 bottom
U3  A111  [A111]  56.9,33.53 0 top
U4  TXB0108DQSR  [UFDFN-20]  23.37,18.29 180 bottom
U5  V_REG_AP2112K-1.8  [SOT23-5]  68.33,18.29 270 bottom
U6  TXB0108DQSR  [UFDFN-20]  56.9,18.29 180 bottom
U7  A111  [A111]  90.42,33.53 0 top
U8  V_REG_AP2112K-1.8  [SOT23-5]  101.85,18.29 270 bottom
U9  TXB0108DQSR  [UFDFN-20]  90.42,18.29 180 bottom
U10  A111  [A111]  123.95,33.53 0 top
U11  V_REG_AP2112K-1.8  [SOT23-5]  135.38,18.29 270 bottom
U12  TXB0108DQSR  [UFDFN-20]  123.95,18.29 180 bottom
U13  A111  [A111]  23.37,73.41 0 top
U14  V_REG_AP2112K-1.8  [SOT23-5]  34.8,58.17 270 bottom
U15  TXB0108DQSR  [UFDFN-20]  23.37,58.17 180 bottom
U16  A111  [A111]  56.9,73.41 0 top
U17  V_REG_AP2112K-1.8  [SOT23-5]  68.33,58.17 270 bottom
U18  TXB0108DQSR  [UFDFN-20]  56.9,58.17 180 bottom
U19  A111  [A111]  90.42,73.41 0 top
U20  V_REG_AP2112K-1.8  [SOT23-5]  101.85,58.17 270 bottom
U21  TXB0108DQSR  [UFDFN-20]  90.42,58.17 180 bottom
U22  A111  [A111]  123.95,73.41 0 top
U23  V_REG_AP2112K-1.8  [SOT23-5]  135.38,58.17 270 bottom
U24  TXB0108DQSR  [UFDFN-20]  123.95,58.17 180 bottom
U25  A111  [A111]  23.37,113.28 0 top
U26  V_REG_AP2112K-1.8  [SOT23-5]  34.8,98.04 270 bottom
U27  TXB0108DQSR  [UFDFN-20]  23.37,98.04 180 bottom
U28  A111  [A111]  56.9,113.28 0 top
U29  V_REG_AP2112K-1.8  [SOT23-5]  68.33,98.04 270 bottom
U30  TXB0108DQSR  [UFDFN-20]  56.9,98.04 180 bottom
U31  A111  [A111]  90.42,113.28 0 top
U32  V_REG_AP2112K-1.8  [SOT23-5]  101.85,98.04 270 bottom
U33  TXB0108DQSR  [UFDFN-20]  90.42,98.04 180 bottom
U34  A111  [A111]  123.95,113.28 0 top
U35  V_REG_AP2112K-1.8  [SOT23-5]  135.38,98.04 270 bottom
U36  TXB0108DQSR  [UFDFN-20]  123.95,98.04 180 bottom
U37  A111  [A111]  23.37,153.16 0 top
U38  V_REG_AP2112K-1.8  [SOT23-5]  34.8,137.92 270 bottom
U39  TXB0108DQSR  [UFDFN-20]  23.37,137.92 180 bottom
U40  A111  [A111]  56.9,153.16 0 top
U41  V_REG_AP2112K-1.8  [SOT23-5]  68.33,137.92 270 bottom
U42  TXB0108DQSR  [UFDFN-20]  56.9,137.92 180 bottom
U43  A111  [A111]  90.42,153.16 0 top
U44  V_REG_AP2112K-1.8  [SOT23-5]  101.85,137.92 270 bottom
U45  TXB0108DQSR  [UFDFN-20]  90.42,137.92 180 bottom
U46  A111  [A111]  123.95,153.16 0 top
U47  V_REG_AP2112K-1.8  [SOT23-5]  135.38,137.92 270 bottom
U48  TXB0108DQSR  [UFDFN-20]  123.95,137.92 180 bottom
U$1  [A111_PULSED_RADAR9]  11.05,40 0 top
U$2  [SCLK3]  17.02,13.59 90 top
U$3  [MISO4]  19.56,13.59 90 top
U$4  [MOSI5]  22.1,13.59 90 top
U$5  [INT8]  24.64,13.59 90 top
U$6  [EN9]  27.18,13.59 90 top
U$7  [GND0]  29.72,13.59 90 top
U$8  [5V1]  32.26,13.59 90 top
U$9  [A111_PULSED_RADAR9]  35.69,40 0 bottom
U$10  [SCLK3]  17.02,13.59 90 bottom
U$11  [MISO4]  19.56,13.59 90 bottom
U$12  [PI_DISPLAY9]  37.59,30.1 90 top
U$13  [#CS9]  14.48,13.46 90 bottom
U$14  [SCLK3]  50.55,13.59 90 top
U$15  [GND0]  29.72,13.59 90 bottom
U$16  [5V1]  32.26,13.59 90 bottom
U$17  [#CS9]  14.48,13.46 90 top
U$18  [EN9]  27.18,13.59 90 bottom
U$19  [MISO4]  53.09,13.59 90 top
U$20  [MOSI5]  55.63,13.59 90 top
U$21  [INT8]  58.17,13.59 90 top
U$22  [GND0]  63.25,13.59 90 top
U$23  [5V1]  65.79,13.59 90 top
U$24  [SCLK3]  50.55,13.59 90 bottom
U$25  [MISO4]  53.09,13.59 90 bottom
U$26  [GND0]  63.25,13.59 90 bottom
U$27  [5V1]  65.79,13.59 90 bottom
U$28  [#CS9]  48.01,13.46 90 top
U$29  [A111_PULSED_RADAR9]  44.58,40 0 top
U$30  [A111_PULSED_RADAR9]  69.22,40 0 bottom
U$31  [PI_DISPLAY9]  71.12,30.1 90 top
U$32  [#CS9]  48.01,13.46 90 bottom
U$33  [EN9]  60.71,13.59 90 bottom
U$34  [EN9]  60.71,13.59 90 top
U$35  [SCLK3]  84.07,13.59 90 top
U$36  [MISO4]  86.61,13.59 90 top
U$37  [MOSI5]  89.15,13.59 90 top
U$38  [INT8]  91.69,13.59 90 top
U$39  [GND0]  96.77,13.59 90 top
U$40  [5V1]  99.31,13.59 90 top
U$41  [SCLK3]  84.07,13.59 90 bottom
U$42  [MISO4]  86.61,13.59 90 bottom
U$43  [GND0]  96.77,13.59 90 bottom
U$44  [5V1]  99.31,13.59 90 bottom
U$45  [#CS9]  81.53,13.46 90 top
U$46  [A111_PULSED_RADAR9]  78.11,40 0 top
U$47  [A111_PULSED_RADAR9]  102.74,40 0 bottom
U$48  [PI_DISPLAY9]  104.65,30.1 90 top
U$49  [#CS9]  81.53,13.46 90 bottom
U$50  [EN9]  94.23,13.59 90 bottom
U$51  [EN9]  94.23,13.59 90 top
U$52  [SCLK3]  117.6,13.59 90 top
U$53  [MISO4]  120.14,13.59 90 top
U$54  [MOSI5]  122.68,13.59 90 top
U$55  [INT8]  125.22,13.59 90 top
U$56  [GND0]  130.3,13.59 90 top
U$57  [5V1]  132.84,13.59 90 top
U$58  [SCLK3]  117.6,13.59 90 bottom
U$59  [MISO4]  120.14,13.59 90 bottom
U$60  [GND0]  130.3,13.59 90 bottom
U$61  [5V1]  132.84,13.59 90 bottom
U$62  [#CS9]  115.06,13.46 90 top
U$63  [A111_PULSED_RADAR9]  111.63,40 0 top
U$64  [A111_PULSED_RADAR9]  136.27,40 0 bottom
U$65  [PI_DISPLAY9]  138.18,30.1 90 top
U$66  [#CS9]  115.06,13.46 90 bottom
U$67  [EN9]  127.76,13.59 90 bottom
U$68  [EN9]  127.76,13.59 90 top
U$69  [SCLK3]  17.02,53.47 90 top
U$70  [MISO4]  19.56,53.47 90 top
U$71  [MOSI5]  22.1,53.47 90 top
U$72  [INT8]  24.64,53.47 90 top
U$73  [GND0]  29.72,53.47 90 top
U$74  [5V1]  32.26,53.47 90 top
U$75  [SCLK3]  17.02,53.47 90 bottom
U$76  [MISO4]  19.56,53.47 90 bottom
U$77  [GND0]  29.72,53.47 90 bottom
U$78  [5V1]  32.26,53.47 90 bottom
U$79  [#CS9]  14.48,53.34 90 top
U$80  [A111_PULSED_RADAR9]  11.05,79.88 0 top
U$81  [A111_PULSED_RADAR9]  35.69,79.88 0 bottom
U$82  [PI_DISPLAY9]  37.59,69.98 90 top
U$83  [#CS9]  14.48,53.34 90 bottom
U$84  [EN9]  27.18,53.47 90 bottom
U$85  [EN9]  27.18,53.47 90 top
U$86  [SCLK3]  50.55,53.47 90 top
U$87  [MISO4]  53.09,53.47 90 top
U$88  [MOSI5]  55.63,53.47 90 top
U$89  [INT8]  58.17,53.47 90 top
U$90  [GND0]  63.25,53.47 90 top
U$91  [5V1]  65.79,53.47 90 top
U$92  [SCLK3]  50.55,53.47 90 bottom
U$93  [MISO4]  53.09,53.47 90 bottom
U$94  [GND0]  63.25,53.47 90 bottom
U$95  [5V1]  65.79,53.47 90 bottom
U$96  [#CS9]  48.01,53.34 90 top
U$97  [A111_PULSED_RADAR9]  44.58,79.88 0 top
U$98  [A111_PULSED_RADAR9]  69.22,79.88 0 bottom
U$99  [PI_DISPLAY9]  71.12,69.98 90 top
U$100  [#CS9]  48.01,53.34 90 bottom
U$101  [EN9]  60.71,53.47 90 bottom
U$102  [EN9]  60.71,53.47 90 top
U$103  [SCLK3]  84.07,53.47 90 top
U$104  [MISO4]  86.61,53.47 90 top
U$105  [MOSI5]  89.15,53.47 90 top
U$106  [INT8]  91.69,53.47 90 top
U$107  [GND0]  96.77,53.47 90 top
U$108  [5V1]  99.31,53.47 90 top
U$109  [SCLK3]  84.07,53.47 90 bottom
U$110  [MISO4]  86.61,53.47 90 bottom
U$111  [GND0]  96.77,53.47 90 bottom
U$112  [5V1]  99.31,53.47 90 bottom
U$113  [#CS9]  81.53,53.34 90 top
U$114  [A111_PULSED_RADAR9]  78.11,79.88 0 top
U$115  [A111_PULSED_RADAR9]  102.74,79.88 0 bottom
U$116  [PI_DISPLAY9]  104.65,69.98 90 top
U$117  [#CS9]  81.53,53.34 90 bottom
U$118  [EN9]  94.23,53.47 90 bottom
U$119  [EN9]  94.23,53.47 90 top
U$120  [SCLK3]  117.6,53.47 90 top
U$121  [MISO4]  120.14,53.47 90 top
U$122  [MOSI5]  122.68,53.47 90 top
U$123  [INT8]  125.22,53.47 90 top
U$124  [GND0]  130.3,53.47 90 top
U$125  [5V1]  132.84,53.47 90 top
U$126  [SCLK3]  117.6,53.47 90 bottom
U$127  [MISO4]  120.14,53.47 90 bottom
U$128  [GND0]  130.3,53.47 90 bottom
U$129  [5V1]  132.84,53.47 90 bottom
U$130  [#CS9]  115.06,53.34 90 top
U$131  [A111_PULSED_RADAR9]  111.63,79.88 0 top
U$132  [A111_PULSED_RADAR9]  136.27,79.88 0 bottom
U$133  [PI_DISPLAY9]  138.18,69.98 90 top
U$134  [#CS9]  115.06,53.34 90 bottom
U$135  [EN9]  127.76,53.47 90 bottom
U$136  [EN9]  127.76,53.47 90 top
U$137  [SCLK3]  17.02,93.34 90 top
U$138  [MISO4]  19.56,93.34 90 top
U$139  [MOSI5]  22.1,93.34 90 top
U$140  [INT8]  24.64,93.34 90 top
U$141  [GND0]  29.72,93.34 90 top
U$142  [5V1]  32.26,93.34 90 top
U$143  [SCLK3]  17.02,93.34 90 bottom
U$144  [MISO4]  19.56,93.34 90 bottom
U$145  [GND0]  29.72,93.34 90 bottom
U$146  [5V1]  32.26,93.34 90 bottom
U$147  [#CS9]  14.48,93.22 90 top
U$148  [A111_PULSED_RADAR9]  11.05,119.76 0 top
U$149  [A111_PULSED_RADAR9]  35.69,119.76 0 bottom
U$150  [PI_DISPLAY9]  37.59,109.86 90 top
U$151  [#CS9]  14.48,93.22 90 bottom
U$152  [EN9]  27.18,93.34 90 bottom
U$153  [EN9]  27.18,93.34 90 top
U$154  [SCLK3]  50.55,93.34 90 top
U$155  [MISO4]  53.09,93.34 90 top
U$156  [MOSI5]  55.63,93.34 90 top
U$157  [INT8]  58.17,93.34 90 top
U$158  [GND0]  63.25,93.34 90 top
U$159  [5V1]  65.79,93.34 90 top
U$160  [SCLK3]  50.55,93.34 90 bottom
U$161  [MISO4]  53.09,93.34 90 bottom
U$162  [GND0]  63.25,93.34 90 bottom
U$163  [5V1]  65.79,93.34 90 bottom
U$164  [#CS9]  48.01,93.22 90 top
U$165  [A111_PULSED_RADAR9]  44.58,119.76 0 top
U$166  [A111_PULSED_RADAR9]  69.22,119.76 0 bottom
U$167  [PI_DISPLAY9]  71.12,109.86 90 top
U$168  [#CS9]  48.01,93.22 90 bottom
U$169  [EN9]  60.71,93.34 90 bottom
U$170  [EN9]  60.71,93.34 90 top
U$171  [SCLK3]  84.07,93.34 90 top
U$172  [MISO4]  86.61,93.34 90 top
U$173  [MOSI5]  89.15,93.34 90 top
U$174  [INT8]  91.69,93.34 90 top
U$175  [GND0]  96.77,93.34 90 top
U$176  [5V1]  99.31,93.34 90 top
U$177  [SCLK3]  84.07,93.34 90 bottom
U$178  [MISO4]  86.61,93.34 90 bottom
U$179  [GND0]  96.77,93.34 90 bottom
U$180  [5V1]  99.31,93.34 90 bottom
U$181  [#CS9]  81.53,93.22 90 top
U$182  [A111_PULSED_RADAR9]  78.11,119.76 0 top
U$183  [A111_PULSED_RADAR9]  102.74,119.76 0 bottom
U$184  [PI_DISPLAY9]  104.65,109.86 90 top
U$185  [#CS9]  81.53,93.22 90 bottom
U$186  [EN9]  94.23,93.34 90 bottom
U$187  [EN9]  94.23,93.34 90 top
U$188  [SCLK3]  117.6,93.34 90 top
U$189  [MISO4]  120.14,93.34 90 top
U$190  [MOSI5]  122.68,93.34 90 top
U$191  [INT8]  125.22,93.34 90 top
U$192  [GND0]  130.3,93.34 90 top
U$193  [5V1]  132.84,93.34 90 top
U$194  [SCLK3]  117.6,93.34 90 bottom
U$195  [MISO4]  120.14,93.34 90 bottom
U$196  [GND0]  130.3,93.34 90 bottom
U$197  [5V1]  132.84,93.34 90 bottom
U$198  [#CS9]  115.06,93.22 90 top
U$199  [A111_PULSED_RADAR9]  111.63,119.76 0 top
U$200  [A111_PULSED_RADAR9]  136.27,119.76 0 bottom
U$201  [PI_DISPLAY9]  138.18,109.86 90 top
U$202  [#CS9]  115.06,93.22 90 bottom
U$203  [EN9]  127.76,93.34 90 bottom
U$204  [EN9]  127.76,93.34 90 top
U$205  [SCLK3]  17.02,133.22 90 top
U$206  [MISO4]  19.56,133.22 90 top
U$207  [MOSI5]  22.1,133.22 90 top
U$208  [INT8]  24.64,133.22 90 top
U$209  [GND0]  29.72,133.22 90 top
U$210  [5V1]  32.26,133.22 90 top
U$211  [SCLK3]  17.02,133.22 90 bottom
U$212  [MISO4]  19.56,133.22 90 bottom
U$213  [GND0]  29.72,133.22 90 bottom
U$214  [5V1]  32.26,133.22 90 bottom
U$215  [#CS9]  14.48,133.1 90 top
U$216  [A111_PULSED_RADAR9]  11.05,159.64 0 top
U$217  [A111_PULSED_RADAR9]  35.69,159.64 0 bottom
U$218  [PI_DISPLAY9]  37.59,149.73 90 top
U$219  [#CS9]  14.48,133.1 90 bottom
U$220  [EN9]  27.18,133.22 90 bottom
U$221  [EN9]  27.18,133.22 90 top
U$222  [SCLK3]  50.55,133.22 90 top
U$223  [MISO4]  53.09,133.22 90 top
U$224  [MOSI5]  55.63,133.22 90 top
U$225  [INT8]  58.17,133.22 90 top
U$226  [GND0]  63.25,133.22 90 top
U$227  [5V1]  65.79,133.22 90 top
U$228  [SCLK3]  50.55,133.22 90 bottom
U$229  [MISO4]  53.09,133.22 90 bottom
U$230  [GND0]  63.25,133.22 90 bottom
U$231  [5V1]  65.79,133.22 90 bottom
U$232  [#CS9]  48.01,133.1 90 top
U$233  [A111_PULSED_RADAR9]  44.58,159.64 0 top
U$234  [A111_PULSED_RADAR9]  69.22,159.64 0 bottom
U$235  [PI_DISPLAY9]  71.12,149.73 90 top
U$236  [#CS9]  48.01,133.1 90 bottom
U$237  [EN9]  60.71,133.22 90 bottom
U$238  [EN9]  60.71,133.22 90 top
U$239  [SCLK3]  84.07,133.22 90 top
U$240  [MISO4]  86.61,133.22 90 top
U$241  [MOSI5]  89.15,133.22 90 top
U$242  [INT8]  91.69,133.22 90 top
U$243  [GND0]  96.77,133.22 90 top
U$244  [5V1]  99.31,133.22 90 top
U$245  [SCLK3]  84.07,133.22 90 bottom
U$246  [MISO4]  86.61,133.22 90 bottom
U$247  [GND0]  96.77,133.22 90 bottom
U$248  [5V1]  99.31,133.22 90 bottom
U$249  [#CS9]  81.53,133.1 90 top
U$250  [A111_PULSED_RADAR9]  78.11,159.64 0 top
U$251  [A111_PULSED_RADAR9]  102.74,159.64 0 bottom
U$252  [PI_DISPLAY9]  104.65,149.73 90 top
U$253  [#CS9]  81.53,133.1 90 bottom
U$254  [EN9]  94.23,133.22 90 bottom
U$255  [EN9]  94.23,133.22 90 top
U$256  [SCLK3]  117.6,133.22 90 top
U$257  [MISO4]  120.14,133.22 90 top
U$258  [MOSI5]  122.68,133.22 90 top
U$259  [INT8]  125.22,133.22 90 top
U$260  [GND0]  130.3,133.22 90 top
U$261  [5V1]  132.84,133.22 90 top
U$262  [SCLK3]  117.6,133.22 90 bottom
U$263  [MISO4]  120.14,133.22 90 bottom
U$264  [GND0]  130.3,133.22 90 bottom
U$265  [5V1]  132.84,133.22 90 bottom
U$266  [#CS9]  115.06,133.1 90 top
U$267  [A111_PULSED_RADAR9]  111.63,159.64 0 top
U$268  [A111_PULSED_RADAR9]  136.27,159.64 0 bottom
U$269  [PI_DISPLAY9]  138.18,149.73 90 top
U$270  [#CS9]  115.06,133.1 90 bottom
U$271  [EN9]  127.76,133.22 90 bottom
U$272  [EN9]  127.76,133.22 90 top
Y1  26MHz  [CRYSTAL-SMD-3.2X2.5MM]  28.45,32.26 90 bottom
Y2  26MHz  [CRYSTAL-SMD-3.2X2.5MM]  61.98,32.26 90 bottom
Y3  26MHz  [CRYSTAL-SMD-3.2X2.5MM]  95.5,32.26 90 bottom
Y4  26MHz  [CRYSTAL-SMD-3.2X2.5MM]  129.03,32.26 90 bottom
Y5  26MHz  [CRYSTAL-SMD-3.2X2.5MM]  28.45,72.14 90 bottom
Y6  26MHz  [CRYSTAL-SMD-3.2X2.5MM]  61.98,72.14 90 bottom
Y7  26MHz  [CRYSTAL-SMD-3.2X2.5MM]  95.5,72.14 90 bottom
Y8  26MHz  [CRYSTAL-SMD-3.2X2.5MM]  129.03,72.14 90 bottom
Y9  26MHz  [CRYSTAL-SMD-3.2X2.5MM]  28.45,112.01 90 bottom
Y10  26MHz  [CRYSTAL-SMD-3.2X2.5MM]  61.98,112.01 90 bottom
Y11  26MHz  [CRYSTAL-SMD-3.2X2.5MM]  95.5,112.01 90 bottom
Y12  26MHz  [CRYSTAL-SMD-3.2X2.5MM]  129.03,112.01 90 bottom
Y13  26MHz  [CRYSTAL-SMD-3.2X2.5MM]  28.45,151.89 90 bottom
Y14  26MHz  [CRYSTAL-SMD-3.2X2.5MM]  61.98,151.89 90 bottom
Y15  26MHz  [CRYSTAL-SMD-3.2X2.5MM]  95.5,151.89 90 bottom
Y16  26MHz  [CRYSTAL-SMD-3.2X2.5MM]  129.03,151.89 90 bottom

## Library data of the parts
C1 C5 C7 C11 C15 C17 C21 C25 C27 C31 C35 C37 C41 C45 C47 C51 C55 C57 C61 C65 C67 C71 C75 C77 C81 C85 C87 C91 C95 C97 C101 C105 C107 C111 C115 C117 C121 C125 C127 C131 C135 C137 C141 C145 C147 C151 C155 C157 = SparkFun-Capacitors; PROD_ID: CAP-00810
C2 C6 C8-C10 C12 C16 C18-C20 C22 C26 C28-C30 C32 C36 C38-C40 C42 C46 C48-C50 C52 C56 C58-C60 C62 C66 C68-C70 C72 C76 C78-C80 C82 C86 C88-C90 C92 C96 C98-C100 C102 C106 C108-C110 C112 C116 C118-C120 C122 C126 C128-C130 C132 C136 C138-C140 C142 C146 C148-C150 C152 C156 C158-C160 = SparkFun-Capacitors; PROD_ID: CAP-00868
C3 C4 C13 C14 C23 C24 C33 C34 C43 C44 C53 C54 C63 C64 C73 C74 C83 C84 C93 C94 C103 C104 C113 C114 C123 C124 C133 C134 C143 C144 C153 C154 = SparkFun-Capacitors; PROD_ID: CAP-11812
E$1-E$4 FD1-FD64 LOGO2 LOGO5 LOGO8 LOGO11 LOGO14 LOGO17 LOGO20 LOGO23 LOGO26 LOGO29 LOGO32 LOGO35 LOGO38 LOGO41 LOGO44 LOGO47 = SparkFun-Aesthetics
E$5 E$6 = SparkFun-Retired
H1-H32 = SparkFun-Hardware
J1 J4 J5 J7 J9 J11 J13 J15 J17 J19 J21 J23 J25 J27 J29 J31 U1-U3 U5 U7 U8 U10 U11 U13 U14 U16 U17 U19 U20 U22 U23 U25 U26 U28 U29 U31 U32 U34 U35 U37 U38 U40 U41 U43 U44 U46 U47 = A111_Radar
J2 J3 J6 J8 J10 J12 J14 J16 J18 J20 J22 J24 J26 J28 J30 J32 = SparkFun-Connectors; PROD_ID: CONN-08438
LOGO1 LOGO3 LOGO4 LOGO6 LOGO7 LOGO9 LOGO10 LOGO12 LOGO13 LOGO15 LOGO16 LOGO18 LOGO19 LOGO21 LOGO22 LOGO24 LOGO25 LOGO27 LOGO28 LOGO30 LOGO31 LOGO33 LOGO34 LOGO36 LOGO37 LOGO39 LOGO40 LOGO42 LOGO43 LOGO45 LOGO46 LOGO48 = SparkX
R1-R16 = SparkFun-Resistors; PROD_ID: RES-07828
U4 U6 U9 U12 U15 U18 U21 U24 U27 U30 U33 U36 U39 U42 U45 U48 = SparkFun-IC-Comms; PROD_ID: IC-12292
U$1-U$272 = buzzard_labels
Y1-Y16 = SparkFun-Clocks; PROD_ID: XTAL-12454